# Altium PCB 3P_JST-XH_EXT.PcbDoc
Units mm, origin at the board's own origin, x right, y up, seen from the top; angles counter-clockwise.
Board outline 17.4 x 49.2 mm, 2 copper layers (Top Layer, Bottom Layer), stack 1.569 mm thick; 6 components, 9 nets, 20 pads, 0 vias.
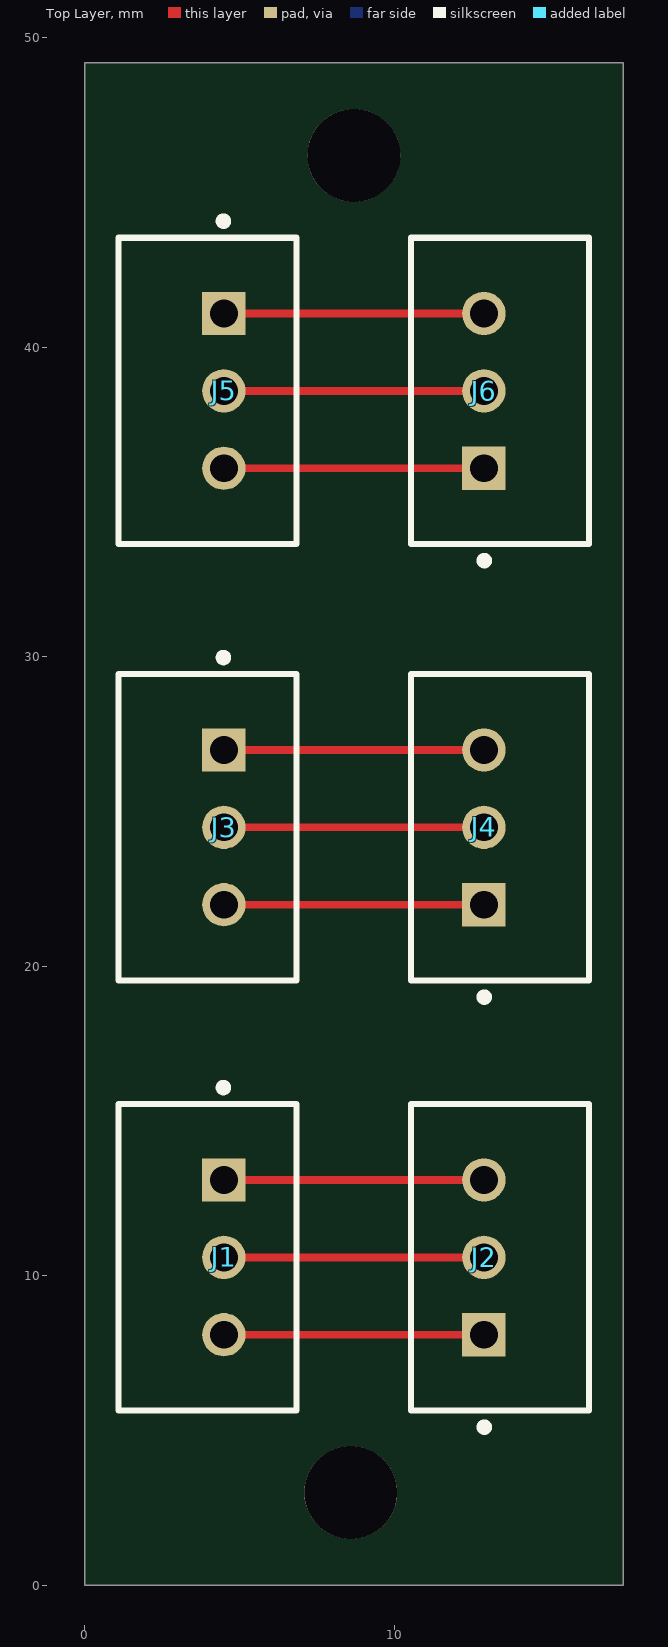
[diagram p0: Top Layer view]
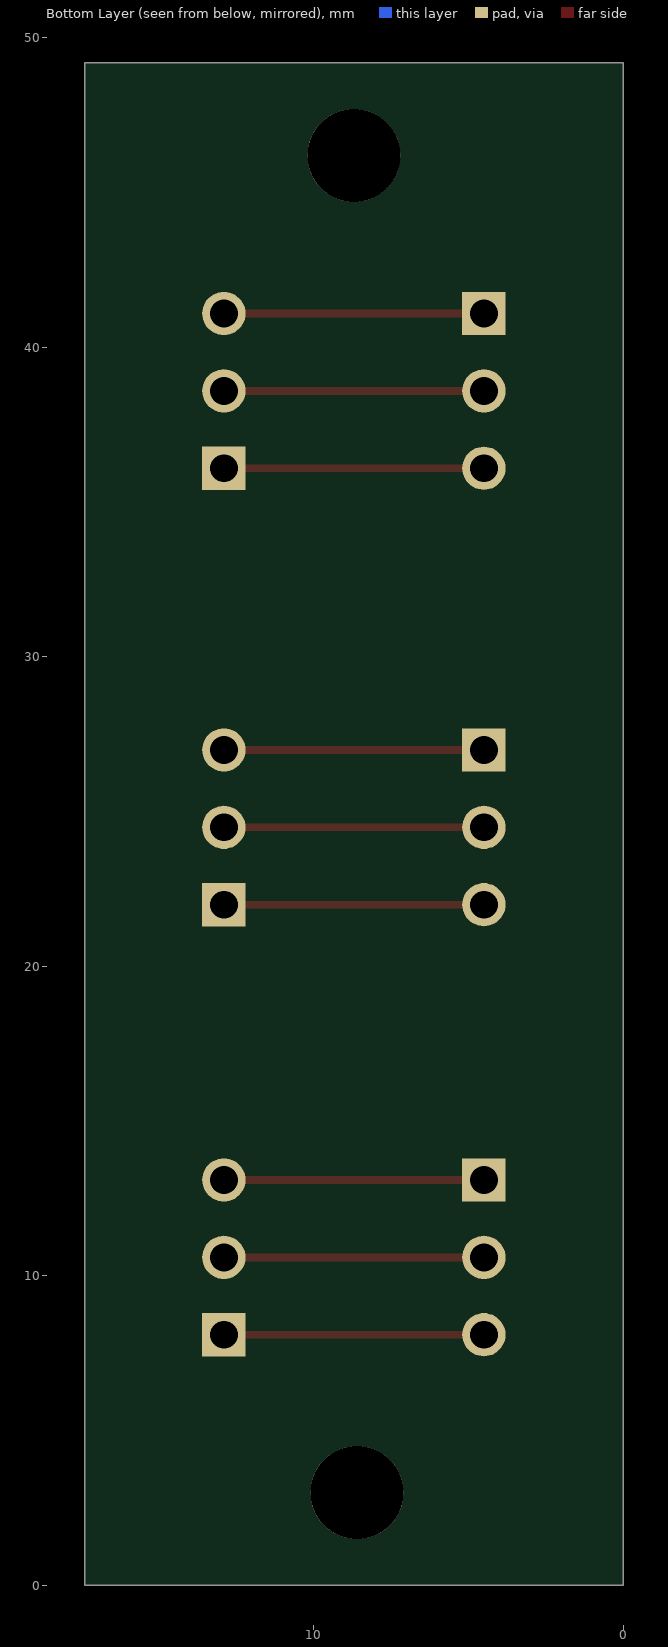
[diagram p1: Bottom Layer view, seen from below]
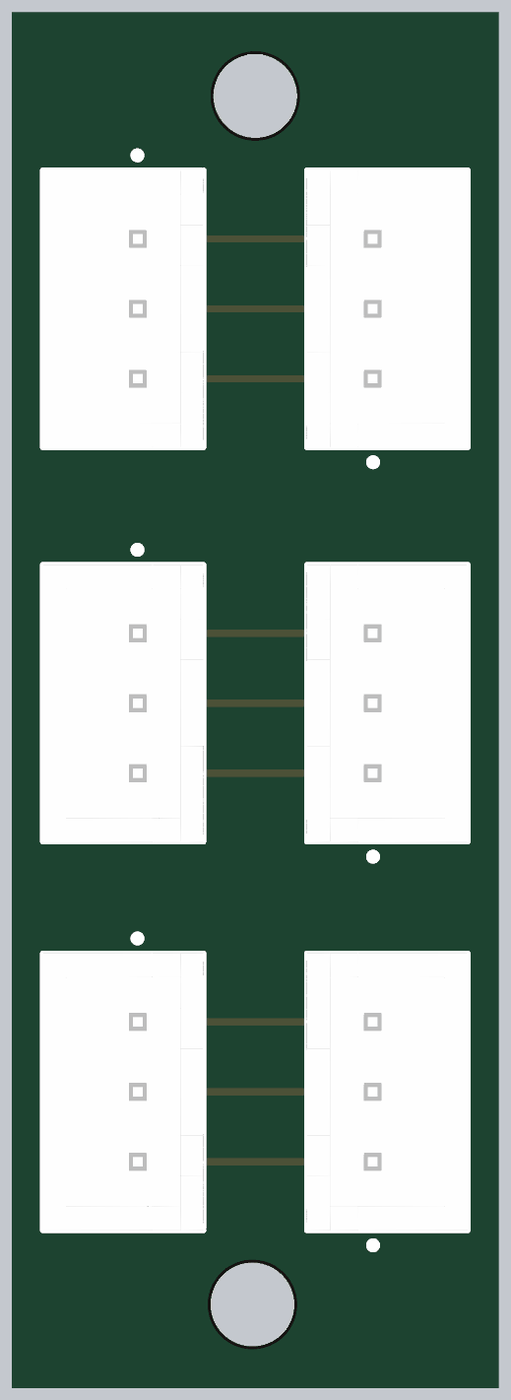
[diagram p2: 3D render of the assembled board from above, using the file's embedded part models]

## Layer stack, top to bottom
Top Solder: solder mask 0.0254, SM-001, Dk 4
Top Layer: signal copper 0.035
Dielectric 1: core 1.4986, Core-043, Dk 4.3
Bottom Layer: signal copper 0.035
Bottom Solder: solder mask 0.0254, SM-001, Dk 4

## Board outline
0,0 17.4,0 17.4,49.2 0,49.2

## Design rules (kind name [scope] priority, off if disabled: settings)
Clearance [All] p1: gap=0.254 ignorepadtopadclearanceinfootprint=FALSE except(0: Arc-Hole Track-Hole SMDPad-Hole THPad-Hole Via-Hole Fill-Hole Poly-Hole Region-Hole Text-Hole)
PolygonConnect [All] p1: connectstyle=Relief reliefconductorwidth=0.254 reliefentries=4 polygonreliefangle="90 Angle" airgapwidth=0.254
RoutingVias [All] p1: holewidth=0.711 width=1.27 viastyle="Through Hole" minholewidth=0.711 minwidth=1.27 maxholewidth=0.711 maxwidth=1.27
SolderMaskExpansion [All] p1: expansion=0.102 istentingtop=FALSE
Width [All] p1: maxlimit=0.254 minlimit=0.254 preferedwidth=0.254
30 further rules are at their usual default settings.

## Components (designator, comment, footprint, x,y, rotation, side; value= is the part's Value field where it differs from the comment)
J1 "B3B-XH-A(LF)(SN)" FP-B3B-XH-A_LF_SN-MFG 3.975,10.6 r270 top
J2 "B3B-XH-A(LF)(SN)" FP-B3B-XH-A_LF_SN-MFG 13.425,10.6 r90 top
J3 "B3B-XH-A(LF)(SN)" FP-B3B-XH-A_LF_SN-MFG 3.975,24.493 r270 top
J4 "B3B-XH-A(LF)(SN)" FP-B3B-XH-A_LF_SN-MFG 13.425,24.493 r90 top
J5 "B3B-XH-A(LF)(SN)" FP-B3B-XH-A_LF_SN-MFG 3.975,38.593 r270 top
J6 "B3B-XH-A(LF)(SN)" FP-B3B-XH-A_LF_SN-MFG 13.425,38.593 r90 top

## Footprints (in the part's own frame and the unit in brackets; to place one, negate y for a bottom-side part, rotate by r counter-clockwise, add the part's x,y. Pads: shape width x height; smd on the part's side, far side on the other; paste and mask are expansions set on the pad)
FP-B3B-XH-A_LF_SN-MFG [mm]
  rect 1.4x1.4 hole 0.9 paste-1000 mask+0: 1(-2.5,0.525)
  round 1.4 hole 0.9 paste-1000 mask+0: 2(0,0.525) 3(2.5,0.525)
  silkscreen extent -5.61,-2.88 4.95,2.88, body extent -5.05,-2.98 5.05,2.98, height 0.25

## Part data
J1 J2 J3 J4 J5 J6: library part CMP-17439-000014-1, "CONN HEADER VERT 3POS 2.5MM", Current Rating=3A, Manufacturer=JST, Package=0, Temperature="-25°C to +85°C", Temperature Range High=+85°C, Temperature Range Low=-25°C, Voltage Rating=250V, Automotive=No, Category=Conn, ComponentLink2Description=Datasheet, ComponentLink2URL=https://www.jst-mfg.com/product/pdf/eng/eXH.pdf, Conn Gender=Male, Conn Orientation=Vertical, Contact Material=Tin,Copper, Device Class L1=Connectors, Device Class L2="Headers and Wire Housings", Device Class L3=unset, Digikey Description="CONN HEADER VERT 3POS 2.5MM", Height=7mm, Lead Free=Yes, Manufacturer Part Number=B3B-XH-A(LF)(SN), Number Of Contacts=3, Number Of Rows=1, Octopart=https://octopart.com/b3b-xh-a%28lf%29%28sn%29-jst-3990185, Pitch=2.5mm, RoHS=TRUE

## Free pads (board coordinates)
  round 3 hole 3 unplated: ""(8.6,3) ""(8.7,46.2)

## Nets (pads, with @x,y where several pads share a name; then routed paths per layer and width w, separated by ;. In a path a pad name is that pad's centre, name@x,y a point inside that pad or via, vN(x,y) a via of type N, cw(c..) or ccw(c..) an arc to the next point about the centre after c; other vN are vias at no path point)
NetJ1_1: J1.1 J2.3 | length 8.4
  Top Layer w0.254: J1.1 J2.3
NetJ1_2: J1.2 J2.2 | length 8.4
  Top Layer w0.254: J1.2 J2.2
NetJ1_3: J1.3 J2.1 | length 8.4
  Top Layer w0.254: J1.3 J2.1
NetJ3_1: J3.1 J4.3 | length 8.4
  Top Layer w0.254: J3.1 J4.3
NetJ3_2: J3.2 J4.2 | length 8.4
  Top Layer w0.254: J3.2 J4.2
NetJ3_3: J3.3 J4.1 | length 8.4
  Top Layer w0.254: J3.3 J4.1
NetJ5_1: J5.1 J6.3 | length 8.4
  Top Layer w0.254: J5.1 J6.3
NetJ5_2: J5.2 J6.2 | length 8.4
  Top Layer w0.254: J5.2 J6.2
NetJ5_3: J5.3 J6.1 | length 8.4
  Top Layer w0.254: J5.3 J6.1